# EAGLE board PCO_Wing (EAGLE 7.5.0)
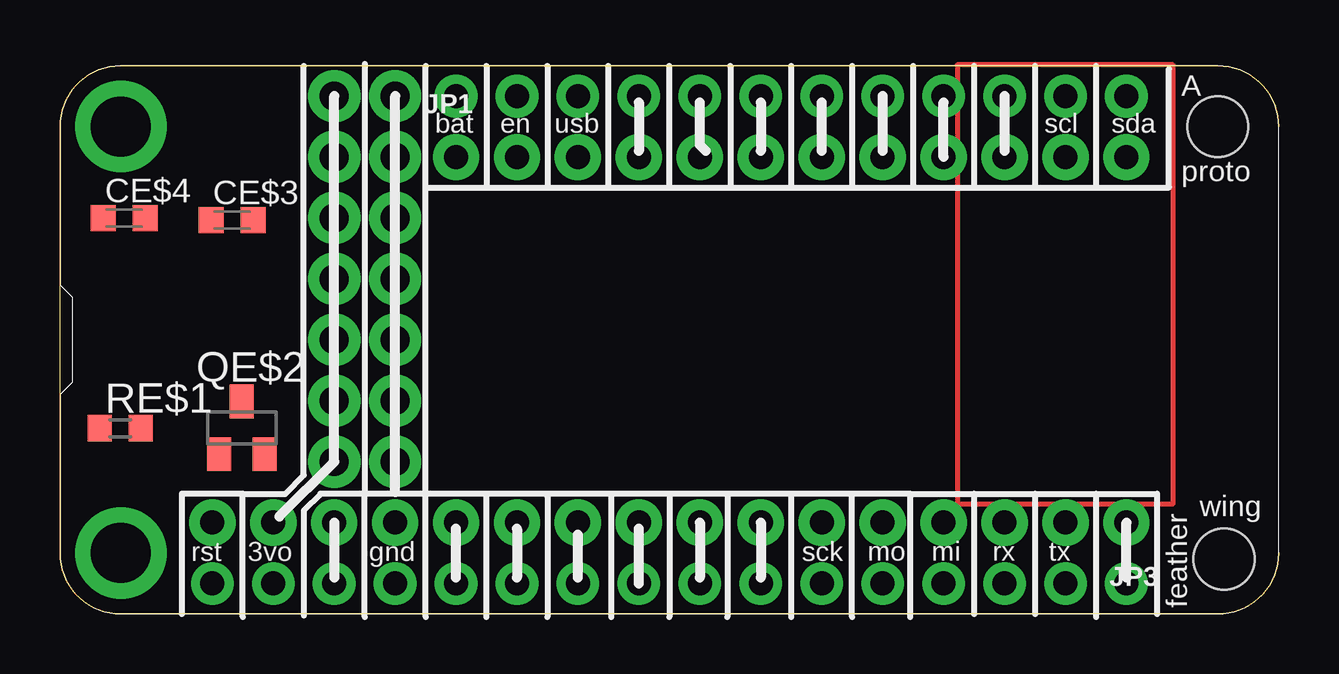
[diagram p0: board, top side]
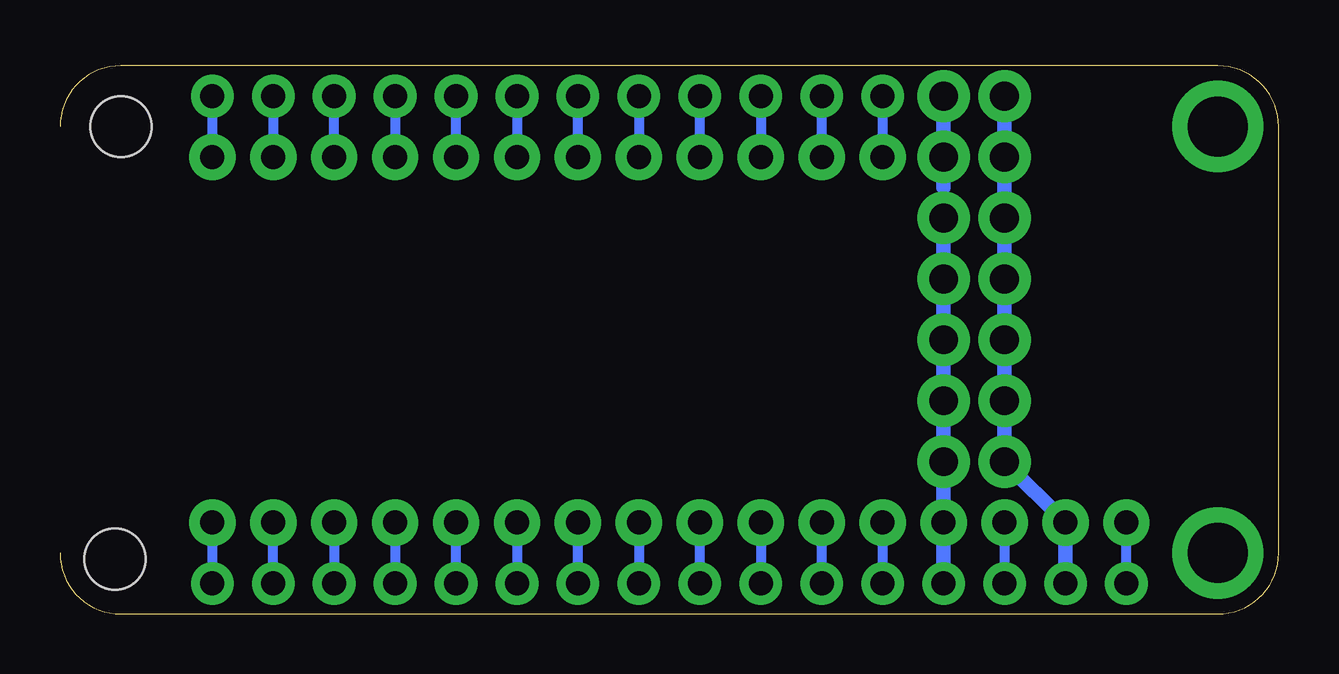
[diagram p1: board, bottom side, seen from below]

Size 50.8 x 22.86 mm. Coordinates in mm from the lower left corner, seen from the top.
Outline: 50.8,20.32 arc90 48.26,22.86 2.54,22.86 arc90 0,20.32 0,2.54 arc90 2.54,0 48.26,0 arc90 50.8,2.54
Copper layers (1*16): Top 0.035mm / dielectric 1.5mm / Bottom 0.035mm
Design rules "default": minimum track width 10mil, minimum drill 24mil, track to track 8mil, track to pad 8mil, pad to pad 8mil, via to via 8mil, smd to smd 8mil, copper to edge 40mil, drill to drill 8mil, minimum pad ring 10mil, minimum via ring 8mil, stop-mask expansion 4mil, vias tented up to drill 0mil, thermal gap 10mil

## Footprints (pad centres in the part's own frame; a part is rotated, then mirrored left to right if it is on the bottom)
C0603K = smd 1.05 x 1.08: 1 -0.875,0; 2 0.875,0
1X12_ROUND_76MIL = drill 1 pad 1.93: 1 -13.97,0; 2 -11.43,0; 3 -8.89,0; 4 -6.35,0; 5 -3.81,0; 6 -1.27,0; 7 1.27,0; 8 3.81,0; 9 6.35,0; 10 8.89,0; 11 11.43,0; 12 13.97,0
1X16_ROUND_76MIL = drill 1 pad 1.93: 1 -19.05,0; 2 -16.51,0; 3 -13.97,0; 4 -11.43,0; 5 -8.89,0; 6 -6.35,0; 7 -3.81,0; 8 -1.27,0; 9 1.27,0; 10 3.81,0; 11 6.35,0; 12 8.89,0; 13 11.43,0; 14 13.97,0; 15 16.51,0; 16 19.05,0
MICROSHIELD_DIM = drill 1 pad 1.778: 1 6.35,1.27; 2 8.89,1.27; 3 11.43,1.27; 4 13.97,1.27; 5 16.51,1.27; 6 19.05,1.27; 7 21.59,1.27; 8 24.13,1.27; 9 26.67,1.27; 10 29.21,1.27; 11 31.75,1.27; 12 34.29,1.27; 13 36.83,1.27; 14 39.37,1.27; 15 41.91,1.27; 16 44.45,1.27; 17 44.45,21.59; 18 41.91,21.59; 19 39.37,21.59; 20 36.83,21.59; 21 34.29,21.59; 22 31.75,21.59; 23 29.21,21.59; 24 26.67,21.59; 25 24.13,21.59; 26 21.59,21.59; 27 19.05,21.59; 28 16.51,21.59 | drill 2.5 pad 3.81: P$1 2.54,20.32; P$2 2.54,2.54 | hole 2.54: 48.26,20.32; 48.514,2.286
SOT23 = smd 1 x 1.4: 1 -0.95,-1.1; 2 0.95,-1.1; 3 0,1.1
R0603 = smd 1 x 1.1: 1 -0.85,0; 2 0.85,0

## Placement (x,y rotation side)
CE$3  0.1 uF  [C0603K]  7.18,16.42 0 top
CE$4  10 uF  [C0603K]  2.68,16.5 0 top
JP1  [1X12_ROUND_76MIL]  30.48,19.05 0 top
JP3  [1X16_ROUND_76MIL]  25.4,3.81 180 top
MS1  MICROSHIELD_NODIM  [MICROSHIELD_DIM]  0,0 0 top
QE$2  [SOT23]  7.58,7.76 0 top
RE$1  68  [R0603]  2.51,7.74 0 top

## Library data of the parts
CE$3 CE$4 QE$2 = ref-packages
JP1 JP3 MS1 = microbuilder
RE$1 = eagle-ltspice

## Nets
3V: JP3.15 MS1.2
AREF: JP3.14 MS1.3
GND: JP3.13 MS1.4
N$1: JP1.2 MS1.27
N$2: JP3.1 MS1.16
N$3: JP1.4 MS1.25
N$4: JP3.2 MS1.15
N$5: JP1.5 MS1.24
N$6: JP3.3 MS1.14
N$7: JP3.4 MS1.13
N$8: JP3.5 MS1.12
N$9: JP3.6 MS1.11
N$10: JP3.7 MS1.10
N$11: JP3.8 MS1.9
N$12: JP3.9 MS1.8
N$13: JP3.10 MS1.7
N$14: JP3.11 MS1.6
N$15: JP3.12 MS1.5
N$18: JP3.16 MS1.1
N$19: JP1.6 MS1.23
N$20: JP1.7 MS1.22
N$21: JP1.8 MS1.21
N$22: JP1.9 MS1.20
N$23: JP1.10 MS1.19
N$24: JP1.11 MS1.18
N$25: JP1.12 MS1.17
USB: JP1.3 MS1.26
VBAT: JP1.1 MS1.28

## Tracks (layer width: path | path; a pad name or v marks a point on that pad's centre or on a via)
3V  (via drill 1.2 pad 2.18)
  Bottom 0.61: MS1.2 JP3.15 v11.43,6.35 v11.43,8.89 v11.43,11.43 v11.43,13.97 v11.43,16.51 v11.43,19.05 v11.43,21.59
AREF
  Bottom 0.406: JP3.14 MS1.3
GND  (via drill 1.2 pad 2.18)
  Bottom 0.406: v13.97,16.51 13.97,17.78
  Bottom 0.61: MS1.4 JP3.13 v13.97,6.35 v13.97,8.89 v13.97,11.43 v13.97,13.97 v13.97,16.51 | v13.97,21.59 v13.97,19.05 13.97,17.78
N$1
  Bottom 0.406: JP1.2 MS1.27
N$2
  Bottom 0.406: JP3.1 MS1.16
N$3
  Bottom 0.406: JP1.4 MS1.25
N$4
  Bottom 0.406: MS1.15 JP3.2
N$5
  Bottom 0.406: MS1.24 JP1.5
N$6
  Bottom 0.406: JP3.3 MS1.14
N$7
  Bottom 0.406: JP3.4 MS1.13
N$8
  Bottom 0.406: MS1.12 JP3.5
N$9
  Bottom 0.406: JP3.6 MS1.11
N$10
  Bottom 0.406: MS1.10 JP3.7
N$11
  Bottom 0.406: JP3.8 MS1.9
N$12
  Bottom 0.406: MS1.8 JP3.9
N$13
  Bottom 0.406: JP3.10 MS1.7
N$14
  Bottom 0.406: MS1.6 JP3.11
N$15
  Bottom 0.406: JP3.12 MS1.5
N$18
  Bottom 0.406: MS1.1 JP3.16
N$19
  Bottom 0.406: JP1.6 MS1.23
N$20
  Bottom 0.406: MS1.22 JP1.7
N$21
  Bottom 0.406: JP1.8 MS1.21
N$22
  Bottom 0.406: MS1.20 JP1.9
N$23
  Bottom 0.406: JP1.10 MS1.19
N$24
  Bottom 0.406: MS1.18 JP1.11
N$25
  Bottom 0.406: MS1.17 JP1.12
S$2
  Top 0.2: 46.4,22.9 37.4,22.9 37.4,4.6 46.4,4.6 46.4,22.9
USB
  Bottom 0.406: MS1.26 JP1.3
VBAT
  Bottom 0.406: MS1.28 JP1.1

## Text on the board
tPlace: A | bat | en | usb | scl | sda | proto | wing | rst | 3vo | gnd | sck | mo | mi | rx | tx | feather